# Altium PCB WCAM-BREAKOUT-PCB-R01.PcbDoc (part 2 of 2)
Units mm, origin at the board's own origin, x right, y up, seen from the top; angles counter-clockwise.
Board outline 42.7 x 48.05 mm, 4 copper layers (Top Layer, Mid1, Mid2, Bottom Layer), stack 1.586 mm thick; 121 components, 86 nets, 382 pads, 183 vias.
Unrouted connection lines stored in the file: 147.
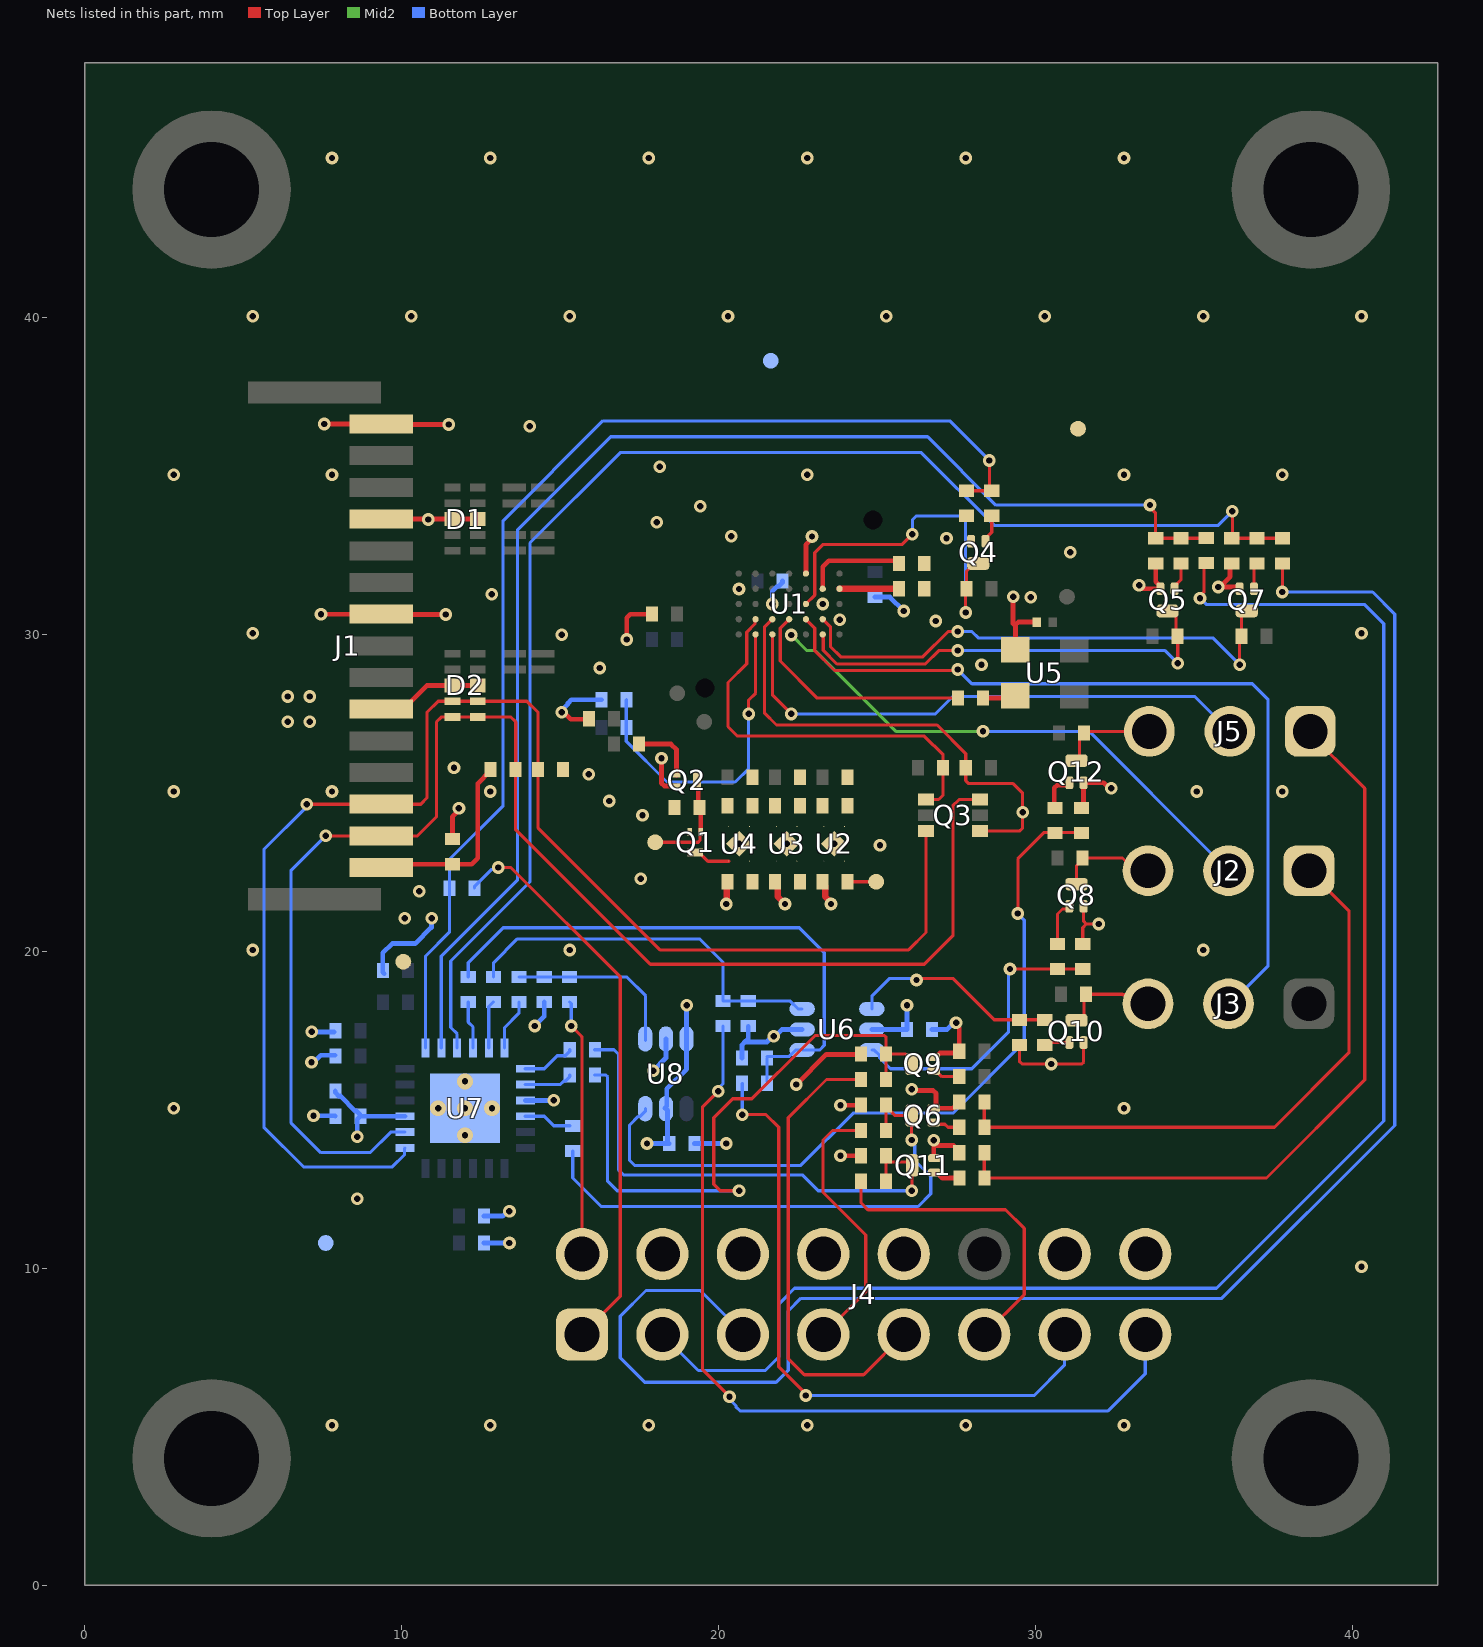
[diagram p4: the nets of this part, all layers, seen from the top]

## Via types
v1: diameter 0.4, hole 0.2, Top Layer to Bottom Layer, tented both sides, 178 vias
v2: diameter 0.5, hole 0.2, Top Layer to Bottom Layer, tented both sides, 5 vias

## Nets (pads, with @x,y where several pads share a name; then routed paths per layer and width w, separated by ;. In a path a pad name is that pad's centre, name@x,y a point inside that pad or via, vN(x,y) a via of type N, cw(c..) or ccw(c..) an arc to the next point about the centre after c; other vN are vias at no path point) (continued)
GND: C1.2 C2.2 C4.2 C5.2 C6.2 C7.2 C8.2 C9.2 C10.2 C11.2 C12.2 C13.2 C14.2 C15.2 C16.2 D1.3 D1.8 D2.3 D2.8 J1.1 J1.4 J1.7 J1.10 J4.4 J4.6 J4.8 J4.10 J4.14 J4.16 Q2.2 Q4.2 Q5.2 Q6.2 Q7.2 Q8.2 Q9.2 Q10.2 Q11.2 Q12.2 R7.1 R8.2 R9.1 R14.1 R19.1 R21.1 R27.1 R28.1 R33.1 R44.1 R45.1 R53.1 R62.1 R64.1 R66.1 R67.1 R68.1 TP6.TP TP7.TP TP8.TP TP9.TP U1.B1 U1.C2 U1.C5 U1.D7 U1.E3 U2.2 U2.5 U3.2 U3.5 U4.2 U4.5 U5.2 U6.2 U7.9 U7.25 U8.2 | length 54.2
  Top Layer w0.1: R53.1@29.5,17.055 29.5,16.538 29.588,16.45 v1(30.5,16.45) 31.466,16.45 31.525,16.509 Q10.2@31.525,17.125 ; R28.1@31.5,20.24 31.5,20.754 31.613,20.867 ; Q8.2@31.525,21.425 31.525,20.955 31.613,20.867 ; v1(32.009,20.867) 31.613,20.867
  Top Layer w0.15: v1(7.45,30.65) J1.7@9.25,30.65 ; v1(7.55,36.65) J1.1@9.35,36.65 9.362,36.638 v1(11.486,36.638) v1(11.486,36.638) v1@11.5,36.65 ; J1.7@9.262,30.638 v1(11.386,30.638) ; J1.10@9.35,27.65 10.05,27.65 10.8,28.4 D2.3@11.6,28.4 D2.8@12.4,28.4 ; J1.4@9.35,33.65 D1.8@12.4,33.65 ; C8.2@11.6,23.545 11.6,24.246 11.806,24.452 v1(11.806,24.52) ; v1(15.05,27.55) 15.118,27.55 15.337,27.331 15.886,27.331 R8.2@15.905,27.35 ; v1(17.1,29.85) 17.1,30.532 17.218,30.65 C4.2@17.905,30.65 ; v1(18.2,26.1) 18.2,25.313 18.288,25.225 Q2.2@18.675,25.225 ; C11.2@20.28,22.2 C11.2@20.293,22.187 ; U1.E3@22.76,31.93 22.76,32.842 22.95,33.032 v1(22.95,33.1) ; U1.B1@23.76,30.5 23.81,30.5 U1.B1@23.82,30.49 23.831,30.479 v1(23.831,30.468) ; v1(26.1,15.65) 26.139,15.611 26.782,15.611 26.87,15.524 Q6.2@26.87,15.05 ; v1(26.792,14.047) 26.795,14.044 v1@26.795,13.873 ; Q6.2@26.795,15.05 Q6.2@26.87,15.05 ; Q9.2@26.795,16.675 26.87,16.675 26.995,16.8 R33.1@27.6,16.8 ; Q11.2@26.82,13.475 26.795,13.5 v1@26.795,13.873 ; v1@27.5,17.7 27.5,17.682 27.6,17.582 R33.1@27.6,16.85 ; R64.1@27.6,13.65 27.6,13.7 27.427,13.873 v1@26.795,13.873 ; R21.1@27.6,15.25 27.6,15.2 27.485,15.085 27.432,15.085 27.397,15.05 Q6.2@26.87,15.05 ; v1(29.3,31.2) 29.3,30.35 29.35,30.3 ; U5.2@29.375,29.525 29.375,30.3 ; 29.375,30.312 29.463,30.4 C13.2@30.05,30.4 ; R68.1@31.461,24.532 31.525,24.596 Q12.2@31.525,25.325 32.157,25.325 32.332,25.15 v1(32.4,25.15) ; v1@33.205,31.509 33.264,31.45 Q5.2@33.95,31.45 33.95,31.525 33.8,31.675 R19.1@33.8,32.255 ; R27.1@36.2,32.255 36.15,32.205 36.15,31.832 35.822,31.504 v1(35.772,31.504) 36.4,31.504 36.45,31.454 Q7.2@36.45,31.45
  Top Layer w0.2: v1(20.25,21.5) 20.265,21.515 20.265,22.159 C11.2@20.293,22.187 ; C6.2@21.78,22.2 21.78,22.15 21.87,22.06 21.87,21.734 22.1,21.504 v1@22.1,21.45 ; C1.2@23.28,22.2 23.28,22.15 23.37,22.06 23.37,21.734 23.55,21.554 v1(23.55,21.5)
  Bottom Layer w0.15: v1(7.165,17.462) R67.1@7.87,17.462 ; v1(7.214,14.814) 7.891,14.814 C16.2@7.905,14.8 ; R66.1@12.595,10.8 v1(13.4,10.8) ; U7.9@13.9,15.3 v1(14.8,15.3) ; v1(14.2,17.65) 14.5,17.951 R62.1@14.5,18.405 ; v1(15.05,27.55) 15.05,27.618 15.251,27.819 15.251,27.844 15.357,27.95 R7.1@16.31,27.95 ; v1(17.941,16.238) 18.341,16.638 U8.2@18.341,17.238 ; C15.2@19.236,13.938 v1(20.241,13.938) ; R44.1@20.746,16.638 20.746,17.055 20.834,17.143 ; R45.1@20.941,17.643 20.941,17.25 20.834,17.143 ; v1(21.7,30.97) 21.7,31.375 21.855,31.53 21.905,31.53 22.02,31.645 C5.2@22.02,31.695 ; v1(21.741,17.328) 21.713,17.328 21.528,17.143 20.834,17.143 ; v1@21.808,17.338 22.008,17.538 U6.2@22.641,17.538 ; R9.1@24.944,31.188 25.412,31.188 v1(25.85,30.75) ; C14.2@26.736,17.538 27.221,17.538 27.432,17.75 v1(27.5,17.75)
  other v1: 7.8,5.05 12.8,5.05 17.8,5.05 22.8,5.05 27.8,5.05 32.8,5.05 40.3,10.05 8.6,12.2 2.8,15.05 32.8,15.05 5.3,20.05 15.3,20.05 35.3,20.05 22.1,21.5 17.55,22.3 25.1,23.35 20.65,23.4 22.15,23.4 23.65,23.4 2.8,25.05 7.8,25.05 12.8,25.05 35.1,25.05 37.8,25.05 11.65,25.8 6.4,27.25 7.1,27.25 6.4,28.05 7.1,28.05 16.25,28.95 28.3,29.05 15.05,30 5.3,30.05 40.3,30.05 26.857,30.433 23.29,30.97 29.856,31.188 12.838,31.282 20.646,31.445 33.277,31.563 31.1,32.6 27.2,33.05 20.4,33.104 18.05,33.554 10.836,33.638 19.427,34.052 2.8,35.05 7.8,35.05 22.8,35.05 32.8,35.05 37.8,35.05 18.148,35.302 14.038,36.582 5.3,40.05 10.3,40.05 15.3,40.05 20.3,40.05 25.3,40.05 30.3,40.05 35.3,40.05 40.3,40.05 7.8,45.05 12.8,45.05 17.8,45.05 22.8,45.05 27.8,45.05 32.8,45.05
  other v2: 12,14.2 11.15,15.05 12,15.05 12.85,15.05 12,15.9
GPIO_1V8__OUT: J5.1 R59.1 R64.2 | length 26
  Top Layer w0.1: R64.2@28.39,13.65 28.39,12.855 R59.1@28.395,12.85 37.3,12.85 40.4,15.95 40.4,25.15 J5.1@38.483,27.067
NetC1_1: C1.1 C6.1 C11.1 Q1.3 TP1.TP U2.4 U3.4 U4.3 U4.4 | length 2.1
  Top Layer w0.1: Q1.3@19.268,23.122 19.393,23.122 19.664,22.851 U4.3@20.325,22.851 ; C1.1@24.07,22.2 TP1.TP@24.975,22.2
NetC2_1: C2.1 R1.2 U2.1
NetC7_1: C7.1 R2.2 U3.1
NetC12_1: C12.1 R4.2 U4.1
NetJ2_3: J2.3 Q8.3 R23.1 | length 3.1
  Top Layer w0.1: Q8.3@31.3,22.125 31.3,22.705 31.495,22.9 R23.1@31.495,22.95 32.754,22.95 33.154,22.55 J2.3@33.56,22.55
NetJ3_3: J3.3 Q10.3 R32.1 | length 3.1
  Top Layer w0.1: Q10.3@31.3,17.825 31.395,17.825 31.541,17.971 31.541,18.596 R32.1@31.595,18.65 32.751,18.65 32.764,18.637 33.273,18.637 J3.3@33.56,18.35
NetJ4_1: J4.1 R30.2 | length 18.1
  Top Layer w0.1: v1(13.05,22.65) 13.45,22.65 16.9,19.2 16.9,9.12 J4.1@15.69,7.91
  Bottom Layer w0.1: R30.2@12.295,22 12.295,22.05 12.838,22.593 12.943,22.593 v1@13,22.65
NetJ4_2: J4.2 R31.1 | length 8.1
  Top Layer w0.1: v1(15.35,17.65) 15.645,17.355 15.688,17.312 J4.2@15.688,10.452
  Bottom Layer w0.1: R31.1@15.3,18.405 15.35,18.355 v1(15.35,17.65)
NetJ4_3: J4.3 R34.2 | length 50.5
  Top Layer w0.1: v1(35.2,31.15) 35.2,31.23 35.329,31.359 35.329,32.189 R34.2@35.4,32.26
  Bottom Layer w0.1: J4.3@18.23,7.91 19.366,6.774 21.474,6.774 21.9,7.2 21.9,8.87 22.4,9.369 35.719,9.369 41,14.65 41,30.35 40.4,30.95 35.409,30.95 35.209,31.15 v1(35.2,31.15)
NetJ4_5: J4.5 R35.2 | length 56.2
  Top Layer w0.1: v1(37.8,31.35) R35.2@37.8,32.255
  Bottom Layer w0.1: J4.5@20.77,7.91 20.77,7.957 19.427,9.3 17.713,9.3 16.9,8.487 16.9,7.175 17.675,6.4 21.82,6.4 22.2,6.78 22.2,8.65 22.6,9.05 35.891,9.05 41.35,14.509 41.35,30.65 40.65,31.35 v1(37.8,31.35)
NetJ4_7: J4.7 R38.2 | length 8.6
  Top Layer w0.1: J4.7@23.31,7.91 24.65,9.25 24.65,11.05 23.3,12.4 23.3,14.05 23.6,14.35 R38.2@24.5,14.35
NetJ4_9: J4.9 R39.2 | length 14.8
  Top Layer w0.1: R39.2@24.5,15.96 23.41,15.96 22.2,14.75 22.2,7.15 22.71,6.64 24.58,6.64 J4.9@25.85,7.91
NetJ4_11: J4.11 R40.2 | length 10
  Top Layer w0.1: R40.2@24.5,12.75 24.5,12.065 24.715,11.85 29.061,11.85 29.65,11.261 29.65,9.17 J4.11@28.39,7.91
NetJ4_13: J4.13 R43.2 | length 20.7
  Top Layer w0.1: v1(20.75,14.85) 21.5,14.85 21.9,14.45 21.9,6.894 v1@22.838,5.956
  Bottom Layer w0.1: R43.2@20.746,15.838 20.75,15.834 v1(20.75,14.85) ; v1(22.752,5.985) 29.971,5.985 30.921,6.935 30.921,7.901 J4.13@30.93,7.91
NetJ4_15: J4.15 R46.2 | length 27.4
  Top Layer w0.1: v1(19.991,15.588) 19.5,15.097 19.5,6.8 v1(20.35,5.95)
  Bottom Layer w0.1: v1(19.991,15.588) 19.991,15.669 20.141,15.819 R46.2@20.141,17.643 ; v1(20.35,5.95) 20.35,5.869 20.549,5.67 20.549,5.631 20.68,5.5 32.3,5.5 33.47,6.67 J4.15@33.47,7.91
NetJ5_3: J5.3 Q12.3 R63.1 | length 3.1
  Top Layer w0.1: Q12.3@31.3,26.025 31.4,26.125 31.4,26.855 31.495,26.95 J5.3@33.6,26.95
NetQ1_1: Q1.1 Q2.3 R3.2 TP4.TP | length 3.3
  Top Layer w0.1: TP4.TP@18,23.45 19.359,23.45 19.418,23.509 19.418,23.747 Q1.1@19.443,23.772
  Top Layer w0.15: Q2.3@19.325,25.35 19.36,25.315 R3.2@19.36,24.55 ; R3.2@19.395,24.55 19.443,24.502 Q1.1@19.443,23.772
NetQ2_1: Q2.1 R6.2 | length 2.2
  Top Layer w0.15: R6.2@17.57,26.625 R6.2@17.495,26.55 18.5,26.55 18.675,26.375 Q2.1@18.675,25.575
NetQ4_1: Q4.1 R13.2 | length 0.9
  Top Layer w0.1: Q4.1@28.425,32.95 28.425,33.032 28.625,33.232 R13.2@28.625,33.755
NetQ5_1: Q5.1 R18.2 | length 0.9
  Top Layer w0.1: Q5.1@34.4,31.45 34.4,31.532 34.6,31.732 R18.2@34.6,32.255
NetQ6_1: Q6.1 R20.2 | length 0.9
  Top Layer w0.1: Q6.1@26.795,14.6 26.847,14.548 27.145,14.548 27.243,14.45 R20.2@27.6,14.45
NetQ7_1: Q7.1 R24.2 | length 0.8
  Top Layer w0.1: Q7.1@36.9,31.45 36.9,32.155 R24.2@37,32.255
NetQ8_1: Q8.1 R25.2 | length 1.4
  Top Layer w0.1: R25.2@30.7,20.24 30.7,21.182 30.859,21.341 31.001,21.341 31.075,21.415 Q8.1@31.075,21.425
NetQ9_1: Q9.1 R29.2 | length 0.9
  Top Layer w0.1: Q9.1@26.795,16.225 26.877,16.225 27.052,16.05 R29.2@27.6,16.05
NetQ10_1: Q10.1 R47.2 | length 0.8
  Top Layer w0.1: R47.2@30.3,17.055 30.37,17.125 Q10.1@31.075,17.125
NetQ11_1: Q11.1 R59.2 | length 0.9
  Top Layer w0.15: Q11.1@26.82,13.025 26.895,13.025 27.07,12.85 R59.2@27.605,12.85
NetQ12_1: Q12.1 R65.2 | length 1.2
  Top Layer w0.15: R65.2@30.623,24.55 30.6,24.573 30.6,25.162 30.688,25.25 31.025,25.25 31.075,25.3 Q12.1@31.075,25.325
NetR15_2: R15.2 U5.3 | length 1.1
  Top Layer w0.1: U5.3@29.3,28 U5.3@29.375,28.075
  Top Layer w0.15: R15.2@28.345,28 U5.3@29.3,28
NetR48_1: R48.1 U7.4 | length 1.5
  Bottom Layer w0.1: R48.1@12.1,18.405 12.1,17.77 12.25,17.62 U7.4@12.25,16.95
NetR49_1: R49.1 U7.5 | length 1.5
  Bottom Layer w0.1: U7.5@12.75,16.95 12.75,18.265 12.89,18.405 R49.1@12.9,18.405
NetR51_1: R51.1 U7.6 | length 1.6
  Bottom Layer w0.1: U7.6@13.25,16.95 13.25,17.6 13.7,18.05 R51.1@13.7,18.405
NetR52_1: R52.1 U7.7 | length 1.7
  Bottom Layer w0.1: U7.7@13.9,16.3 14.5,16.3 14.91,16.71 15.165,16.71 15.305,16.85 R52.1@15.305,16.9
NetR55_1: R55.1 U7.8 | length 1.6
  Bottom Layer w0.1: U7.8@13.9,15.8 15.005,15.8 15.115,15.91 15.165,15.91 15.305,16.05 R55.1@15.305,16.1
NetR56_1: R56.1 U7.10 | length 1.5
  Bottom Layer w0.1: U7.10@13.9,14.8 14.5,14.8 14.8,14.5 R56.1@15.305,14.5
PE_IN_FSIN: Q9.3 R26.1 R39.1 R55.2 | length 19.9
  Top Layer w0.1: v1(20.65,12.45) 20.05,12.45 19.85,12.65 19.85,14.75 20.45,15.35 21.05,15.35 22.75,17.05 23.05,17.35 25.231,17.35 25.29,17.291 R26.1@25.29,16.76 ; R39.1@25.29,15.96 R26.1@25.29,16.76 ; Q9.3@26.095,16.45 26.095,16.573 25.908,16.76 R26.1@25.29,16.76
  Bottom Layer w0.1: R55.2@16.095,16.1 16.441,16.1 16.5,16.041 16.5,12.75 16.8,12.45 v1(20.65,12.45)
PE_IN_GPIO: Q11.3 R40.1 R52.2 R54.1 | length 16.5
  Top Layer w0.1: R40.1@25.29,12.75 25.29,13.36 R54.1@25.43,13.36 ; R54.1@25.29,13.55 25.29,13.5 R54.1@25.43,13.36 ; v1(26.1,12.45) 26.11,12.46 26.11,13.24 Q11.3@26.12,13.25 26.01,13.36 R54.1@25.43,13.36
  Bottom Layer w0.1: R52.2@16.095,16.9 16.7,16.9 16.85,16.75 16.85,13.1 17,12.95 22.65,12.95 23.15,12.45 v1(26.1,12.45)
PE_IN_STROBE: Q6.3 R17.1 R38.1 R56.2 | length 17.1
  Top Layer w0.1: R38.1@25.29,14.35 R17.1@25.29,15.1 ; R17.1@25.29,15.15 R17.1@25.29,15.1 ; v1(26.1,14.05) 26.098,14.052 26.098,14.823 Q6.3@26.095,14.825 25.565,14.825 R17.1@25.29,15.1
  Bottom Layer w0.1: R56.2@15.4,13.7 15.4,12.85 16.3,11.95 26.3,11.95 26.7,12.35 26.7,12.9 26.197,13.403 26.197,13.871 26.069,14 v1@26.05,14
PE_OUT_FSIN: R45.2 R46.1 R49.2 U6.3 | length 12.1
  Bottom Layer w0.1: R49.2@12.9,19.195 12.9,19.65 13.65,20.4 19.4,20.4 20.141,19.659 R46.1@20.141,18.433 R45.2@20.941,18.433 22.263,18.433 22.508,18.188 U6.3@22.641,18.188
PE_OUT_FSIN_INV: R47.1 R53.2 U6.4 | length 6.7
  Top Layer w0.1: v1(26.25,19.1) 26.3,19.15 27.4,19.15 28.705,17.845 R53.2@29.5,17.845 R47.1@30.3,17.845
  Bottom Layer w0.1: U6.4@24.841,18.188 24.841,18.591 25.4,19.15 26.2,19.15 v1(26.25,19.1)
PE_OUT_GPIO: R31.2 R51.2 R62.2 U8.1 | length 5.9
  Bottom Layer w0.1: R51.2@13.7,19.195 R31.2@15.3,19.195 17.105,19.195 17.7,18.6 U8.1@17.7,17.2 ; U8.1@17.691,17.238 U8.1@17.691,17.475
PE_OUT_GPIO_INV: R65.1 R68.2 U8.6 | length 24.2
  Top Layer w0.1: v1(29.45,21.2) 29.45,22.924 30.286,23.76 30.623,23.76 R68.2@31.423,23.76
  Bottom Layer w0.1: U8.6@17.691,15.038 17.691,14.958 17.529,14.796 17.471,14.796 17.191,14.516 17.191,13.409 17.35,13.25 22.6,13.25 24.25,14.9 27.403,14.9 29.65,17.147 29.65,20.991 29.45,21.191 v1(29.45,21.2)
PE_OUT_PWDNB: R24.1 R27.2 R35.1 U7.3 | length 44
  Top Layer w0.1: v1(36.223,33.892) 36.223,33.068 R27.2@36.2,33.045 R35.1@37.8,33.045
  Bottom Layer w0.1: U7.3@11.75,16.95 11.75,17.4 11.55,17.6 11.55,19.7 14.05,22.2 14.05,32.9 16.9,35.75 26.4,35.75 28.7,33.45 35.78,33.45 v1(36.223,33.892)
PE_OUT_STROBE: R43.1 R44.2 R48.2 U6.1 | length 18.1
  Bottom Layer w0.1: R48.2@12.1,19.195 12.1,19.65 13.2,20.75 22.55,20.75 23.341,19.959 23.341,17.041 23.188,16.888 22.432,16.888 22.232,16.688 R44.2@21.536,16.688 ; R43.1@21.536,15.838 R44.2@21.536,16.638
PE_OUT_STROBE_INV: R25.1 R28.2 U6.6 | length 9.4
  Top Layer w0.1: v1(29.2,19.45) R28.2@31.5,19.45
  Bottom Layer w0.1: U6.6@24.841,16.888 24.921,16.888 25.083,16.727 25.083,16.646 25.429,16.3 28,16.3 29.15,17.45 29.15,19.4 v1(29.2,19.45)
PE_OUT_XSHDN: R13.1 R14.2 R30.1 U7.1 | length 36.7
  Top Layer w0.1: R14.2@27.825,34.545 R13.1@28.625,34.545 28.55,34.62 v1(28.55,35.5)
  Bottom Layer w0.1: U7.1@10.75,16.95 10.75,19.85 11.505,20.605 R30.1@11.505,22 11.505,22.905 13.2,24.6 13.2,33.6 16.35,36.75 27.3,36.75 28.5,35.55 28.5,35.5 v1(28.55,35.5)
PE_OUT_XSHDN2: R18.1 R19.2 R34.1 U7.2 | length 42.2
  Top Layer w0.1: v1(33.623,34.092) 33.623,34.011 33.8,33.834 R19.2@33.8,33.045 35.395,33.045 R34.1@35.4,33.05
  Bottom Layer w0.1: U7.2@11.25,16.95 11.25,19.85 13.65,22.25 13.65,33.3 16.6,36.25 26.6,36.25 28.758,34.092 v1(33.623,34.092)
SCL: D2.4 D2.7 J1.13 Q3.3 R36.1 U7.19 | length 47.4
  Top Layer w0.1: v1(7,24.65) J1.13@9.35,24.65 10.6,24.65 10.8,24.85 10.8,27.55 11.15,27.9 D2.4@11.6,27.9 D2.7@12.4,27.9 13.95,27.9 14.305,27.545 R36.1@14.305,25.75 14.305,23.895 18.15,20.05 26,20.05 26.55,20.6 Q3.3@26.55,23.8
  Bottom Layer w0.1: v1(7,24.65) 7,24.569 5.65,23.219 5.65,14.45 6.9,13.2 9.703,13.2 10.087,13.584 10.087,13.787 U7.19@10.1,13.8
SCL_1V8: Q3.1 R10.1 U1.B6 | length 12.8
  Top Layer w0.1: U1.B6@21.17,30.49 21.151,30.471 21.151,30.344 20.89,30.084 20.89,29.082 20.3,28.492 20.3,27.1 20.6,26.8 26.5,26.8 27.09,26.21 R10.1@27.09,25.8 27.09,24.94 26.95,24.8 ; Q3.1@26.55,24.8 26.931,24.8
SDA: D2.5 D2.6 J1.14 Q3.6 R37.1 U7.20 | length 47.5
  Top Layer w0.1: v1(7.6,23.65) J1.14@9.35,23.65 10.5,23.65 11.1,24.25 11.1,27.25 11.25,27.4 D2.5@11.6,27.4 D2.6@12.4,27.4 13.45,27.4 13.6,27.25 R37.1@13.6,25.75 ; R37.1@13.59,25.75 13.59,23.86 17.85,19.6 26.5,19.6 27.4,20.5 27.4,24.6 27.6,24.8 Q3.6@28.25,24.8
  Bottom Layer w0.1: 6.5,17.05 6.5,14.6 7.45,13.65 9,13.65 9.65,14.3 U7.20@10.1,14.3 ; 6.5,17.053 6.5,22.55 v1(7.6,23.65)
SDA_1V8: Q3.4 R11.1 U1.B5 | length 15.2
  Top Layer w0.1: U1.B5@21.7,30.49 21.45,30.24 21.45,27.532 21.832,27.15 26.9,27.15 27.805,26.245 R11.1@27.805,25.8 27.805,25.395 27.9,25.3 29.3,25.3 29.6,25 v1(29.6,24.4) 29.6,23.9 29.5,23.8 Q3.4@28.25,23.8
SNS_FSIN: J3.2 U1.B3 | length 26.1
  Top Layer w0.1: U1.B3@22.76,30.49 23.04,30.21 23.04,29.493 23.663,28.87 27.52,28.87 v1(27.55,28.9)
  Bottom Layer w0.1: v1@27.552,28.898 28,28.45 36.85,28.45 37.35,27.95 37.35,19.55 J3.2@36.2,18.4
SNS_GPIO: J5.2 U1.A5 | length 17.3
  Top Layer w0.1: U1.A5@21.7,30.01 21.7,28.1 v1(22.3,27.5)
  Bottom Layer w0.1: v1@22.309,27.5 26.85,27.5 27.4,28.05 35.04,28.05 J5.2@36.14,26.95
SNS_PWDNB: Q7.3 R22.1 U1.B2 | length 16.6
  Top Layer w0.1: U1.B2@23.29,30.49 23.54,30.24 23.54,29.614 23.854,29.3 26.45,29.3 27.25,30.1 v1(27.55,30.1) ; v1(36.45,29.05) 36.45,29.895 R22.1@36.505,29.95 36.505,30.604 36.651,30.75 Q7.3@36.675,30.75
  Bottom Layer w0.1: v1(27.55,30.1) 28,30.1 28.2,29.9 35.6,29.9 v1(36.45,29.05)
SNS_SID: R5.2 R7.2 U1.A6 | length 10.3
  Top Layer w0.1: v1@20.95,27.45 v1(20.95,27.5) 20.95,27.938 21.17,28.158 U1.A6@21.17,30.01
  Bottom Layer w0.1: R7.2@17.1,27.95 17.09,27.94 R5.2@17.09,27.075 17.09,26.635 18.375,25.35 20.525,25.35 20.95,25.775 v1(20.95,27.5)
SNS_STROBE: J2.2 U1.A4 | length 17.1
  Top Layer w0.1: J2.2@36.1,22.55 J2.2@36.1,22.956
  Mid2 w0.1: v1(22.3,29.993) 22.793,29.5 23.05,29.5 25.6,26.95 v1(28.35,26.95)
  Bottom Layer w0.1: v1(28.35,26.95) 31.7,26.95 35.65,23 J2.2@36.05,23
SNS_VH: C9.1 U1.D1 | length 1.9
  Top Layer w0.2: U1.D1@23.82,31.45 C9.1@25.705,31.45
SNS_VN: C10.1 U1.D2 | length 3.2
  Top Layer w0.1: 23.482,32.332 23.518,32.332
  Top Layer w0.15: U1.D2@23.29,31.45 23.29,32.14 23.482,32.332 ; 23.518,32.332 25.623,32.332 C10.1@25.705,32.25
SNS_XSHDN: Q4.3 R12.1 U1.C3 | length 12
  Top Layer w0.1: U1.C3@22.801,30.955 22.785,30.97 U1.C3@22.76,30.97 23.04,31.25 23.04,32.587 23.303,32.85 25.8,32.85 v1(26.12,33.17) ; v1(27.8,30.7) 27.8,31.42 R12.1@27.83,31.45 27.83,32.003 28.077,32.25 Q4.3@28.2,32.25
  Bottom Layer w0.1: v1(26.12,33.17) 26.12,33.62 26.25,33.75 27.65,33.75 27.8,33.6 v1(27.8,30.7)
SNS_XSHDN2: Q5.3 R16.1 U1.A2 | length 14.1
  Top Layer w0.1: U1.A2@23.29,30.01 23.309,29.991 23.309,29.507 23.739,29.077 26.527,29.077 26.95,29.5 v1(27.55,29.5) ; Q5.3@34.175,30.75 34.292,30.75 34.438,30.604 34.438,30.007 34.5,29.945 v1(34.5,29.1)
  Bottom Layer w0.1: v1(27.55,29.5) 34.1,29.5 v1(34.5,29.1)
SNS_XVCLK: R15.1 U1.B4 | length 7.5
  Top Layer w0.1: U1.B4@22.23,30.49 21.95,30.21 21.95,30.114 21.95,29.906 21.95,29.169 23.119,28 R15.1@27.555,28
STROBE_1V8__OUT: J2.1 R20.1 R21.2 | length 19.6
  Top Layer w0.1: R21.2@28.39,15.25 R20.1@28.39,14.45 37.55,14.45 39.9,16.8 39.9,21.29 J2.1@38.64,22.55
VCC3.3: C8.1 C14.1 C15.1 C16.1 J1.15 Q1.2 R3.1 R17.2 R26.2 R36.2 R37.2 R42.2 R50.1 R54.2 R60.2 R61.2 U6.5 U7.21 U8.3 U8.5 | length 25
  Top Layer w0.15: J1.15@9.35,22.65 9.455,22.755 C8.1@11.6,22.755 12.205,22.755 12.4,22.95 12.4,25.3 12.8,25.7 R37.2@12.8,25.75 ; v1(22.45,15.8) 23.4,16.75 24.49,16.75 R26.2@24.5,16.76 ; v1(23.85,13.55) R54.2@24.5,13.55 ; v1(23.85,15.15) R17.2@24.5,15.15
  Bottom Layer w0.15: v1(7.15,16.5) 7.218,16.5 7.444,16.726 R61.2@7.895,16.726 ; R50.1@7.905,15.6 7.905,15.55 8.02,15.435 8.07,15.435 8.54,14.965 8.58,14.965 8.695,14.85 C16.1@8.695,14.8 ; v1(8.6,14.15) 8.6,14.705 C16.1@8.695,14.8 ; R42.2@9.45,19.3 9.405,19.345 R42.2@9.405,19.4 9.405,19.955 9.7,20.25 10.427,20.25 10.938,20.761 10.938,21.038 v1(10.95,21.05) ; U7.21@10.1,14.8 C16.1@8.695,14.8 ; R60.2@12.595,11.65 13.182,11.65 13.332,11.8 v1(13.4,11.8) ; v1(17.741,13.938) C15.1@18.446,13.938 18.393,13.991 18.393,14.986 U8.5@18.341,15.038 ; U8.5@18.3,15.05 18.363,15.113 18.363,15.663 18.991,16.291 U8.3@18.991,17.238 18.991,18.291 v1(19,18.3) ; U6.5@24.841,17.538 C14.1@25.946,17.538 25.948,17.54 25.948,18.298 v1(25.95,18.3)
  other v1: 10.1,21.05 10.55,21.9 17.6,24.3 16.55,24.75 15.9,25.6
pads on no net: J1.12 J1.MT U7.11 U7.12 U7.13 U7.14 U7.15 U7.16 U7.17 U8.4

## Polygon pours and split planes (outlines as drawn)
GND on Top Layer "NONET_L04_P-001" (solid, remove dead copper, pour order 39): 0,28.8 0,0 42.7,0 42.7,21.593 40.75,21.593 40.75,12.15 33.28,4.68 14.07,4.68 13.25,5.5 13.25,17.845 10.645,20.45 4.55,20.45 4.55,27.9 3.65,28.8
GND on Top Layer "NONET_L04_P-001" (solid, pour order 37): 40.75,21.593 42.7,21.593 42.7,48.05 0,48.05 0,28.8 3.65,28.8 3.65,37.9 5.15,39.4 27.75,39.4 32.65,34.5 35.35,34.5 38.687,34.5 40.75,31.72
NetC1_1 on Top Layer "NONET_L04_P-001" (solid, remove dead copper, pour order 6): 19.019,23.251 19.019,21.664 20.028,20.656 23.594,20.656 24.26,21.322 24.26,22.582 24.13,22.712 24.13,23.172 24.005,23.172 23.82,22.987 23.82,22.501 23.881,22.439 23.881,21.962 23.882,21.961 23.722,21.801 22.918,21.801 22.758,21.961 22.758,22.587 22.63,22.715 22.63,23.175 22.505,23.175 22.32,22.99 22.32,22.501 22.38,22.441 22.38,21.93 22.251,21.801 21.416,21.801 21.256,21.961 21.26,21.965 21.26,22.582 21.13,22.712 21.13,23.17 21.007,23.17 21.005,23.172 20.82,22.987 20.82,22.711 20.88,22.651 20.88,21.958 20.723,21.801 19.805,21.801 19.526,22.081 19.526,23.251
GND on Top Layer "NONET_L04_P-001" (solid, pour order 33): 30.2,31.387 29.95,31.7 29.2,31.7 29.05,31.55 29.05,30.1 28.9,29.95 28.9,29.1 29.8,29.1 29.85,29.15 29.85,29.9 30.2,30.25
VCC3.3 on Top Layer "NONET_L04_P-001" (solid, pour order 30): 14.9,26 14.9,25.5 16.5,23.9 18.35,23.9 18.6,23.65 19.16,23.65 19.16,24.04 18.8,24.4 18.8,24.8 17.5,24.8 16.3,26
VCC3.3 on Top Layer "NONET_L04_P-001" (solid, pour order 29): 9.45,22.95 9.45,22.35 9.65,22.05 9.65,20.9 9.8,20.75 11.4,20.75 11.85,21.2 11.85,22.95 11.75,23.05 9.7,23.05
NetC12_1 on Top Layer "NONET_L04_P-001" (solid, pour order 3): 20.88,25.74 20.88,24.148 20.822,24.09 20.823,24.089 20.823,23.811 21.005,23.629 21.124,23.629 21.26,23.766 21.26,25.74
NetC7_1 on Top Layer "NONET_L04_P-001" (solid, pour order 4): 22.38,25.74 22.38,24.148 22.322,24.09 22.323,24.089 22.323,23.811 22.505,23.629 22.624,23.629 22.76,23.766 22.76,25.74
NetC2_1 on Top Layer "NONET_L04_P-001" (solid, pour order 5): 23.88,25.74 23.88,24.148 23.822,24.09 23.823,24.089 23.823,23.811 24.005,23.629 24.124,23.629 24.26,23.766 24.26,25.74
GND on Top Layer "NONET_L04_P-001" (solid, pour order 8): 20.09,24.84 20.09,24.169 20.17,24.089 20.17,23.47 20.649,22.99 20.938,23.279 21.862,23.279 22.149,22.991 22.437,23.279 23.361,23.279 23.649,22.991 23.68,23.027 23.968,23.31 24.058,23.4 23.479,23.979 23.479,24.84 23.09,24.84 23.09,24.368 23.17,24.288 23.17,23.629 22.996,23.455 22.506,23.455 22.158,23.803 22.158,23.807 22.154,23.807 21.981,23.981 21.981,24.839 21.591,24.839 21.591,24.172 21.67,24.093 21.67,23.619 21.552,23.5 20.96,23.5 20.48,23.98 20.48,24.84
DOVDD on Top Layer "NONET_L04_P-001" (solid, pour order 9): 23.47,25.26 23.47,25.74 23.515,25.74 23.765,25.99 23.765,26.409 22.765,26.409 22.765,26.02 23.045,25.74 23.09,25.74 23.09,25.267 23.097,25.26
AVDD on Top Layer "NONET_L04_P-001" (solid, pour order 10): 20.469,25.258 20.469,25.738 20.514,25.738 20.763,25.988 20.763,26.407 19.763,26.407 19.763,26.019 20.043,25.738 20.089,25.738 20.089,25.266 20.096,25.258
DVDD on Top Layer "NONET_L04_P-001" (solid, pour order 11): 21.972,25.265 21.972,25.745 22.017,25.745 22.266,25.995 22.266,26.414 21.266,26.414 21.266,26.025 21.546,25.745 21.592,25.745 21.592,25.273 21.599,25.265
GND on Top Layer "NONET_L04_P-001" (solid, pour order 2): 28.065,33.945 28.1,33.91 28.1,32.795 28.057,32.751 27.901,32.751 26.685,31.535 26.685,31.21 26.305,31.21 26.305,32.663 27.587,33.945
GND on Top Layer "NONET_L04_P-001" (solid, pour order 1): 9.7,27.95 8.1,27.95 7.5,28.65 6,28.65 5.6,28.25 5.6,26.95 6,26.55 7.5,26.55 8.1,27.35 9.7,27.35
GND on Mid2 "NONET_L04_P-001" (solid, pour order 35): 0,48.05 0,0 42.7,0 42.7,48.05
AVDD on Mid2 "NONET_L04_P-001" (solid, pour order 0): 20.85,26.5 20.9,26.45 20.9,25.9 20.8,25.8 18.9,25.8 18.55,26.15 18.55,32.15 19.1,32.7 24.6,32.7 25.1,32.2 25.1,29.8 24.95,29.65 23.1,29.65 22.4,30.35 22.2,30.35 22,30.55 22,31.1 22.05,31.2 22.4,31.2 22.45,31.1 22.45,30.8 22.6,30.65 22.87,30.65 23.15,30.883 23.15,32.05 23,32.2 19.7,32.2 19.25,31.75 19.25,30.65 19.35,30.55 19.75,30.55 19.9,30.4 19.9,30.1 19.75,29.95 19.4,29.95 19.3,29.85 19.3,26.6 19.4,26.5 20.25,26.5
DVDD on Mid2 "NONET_L04_P-001" (solid, pour order 18): 20.95,31.25 22.9,31.25 23.05,31.4 23.05,32 22.9,32.15 19.75,32.15 19.3,31.7 19.3,30.7 19.4,30.6 19.8,30.6 19.95,30.45 19.95,30.05 19.8,29.9 19.45,29.9 19.35,29.8 19.35,28.4 19.35,26.683 19.45,26.55 21.2,26.55 21.2,25.9 21.3,25.8 22.4,25.8 22.5,25.9 22.5,28.155 20.75,30.011 20.75,31.05
DOVDD on Mid2 "Mid2-DOVDD" (solid, pour order 19): 27.5,24 28.7,22.8 29.95,21.55 29.95,19.15 29.5,18.7 29.5,18.45 29.7,18.25 30.35,18.25 30.7,18.6 30.7,25.4 29.8,26.3 29.8,29.25 30.2,29.65 38,29.65 38.05,29.6 38.4,29.6 38.55,29.75 38.55,30.1 38.45,30.2 33.55,30.2 32.3,30.2 32.05,30.2 31.95,30.3 31.95,30.85 31.8,31 31.15,31 31,30.85 31,30.3 30.9,30.2 29.85,30.2 29.3,30.75 28.35,30.75 28.2,30.6 28.2,30.3 28.4,30.1 29.05,30.1 29.2,29.95 29.2,27.5 29.05,27.35 29.05,26.3 28.9,26.15 26.15,26.15 23,29.3 21.4,30.811 21.4,31.1 21.3,31.2 21,31.2 20.9,31.1 20.9,30.8 21,30.7 21,29.9 22.6,28.3 22.6,25.9 22.7,25.8 22.7,25.55 22.65,25.5 17.9,25.5 17.7,25.7 17.25,25.7 17.15,25.6 17.15,25.15 17.3,25 20.9,25 21.1,24.8 21.1,21.35 21.25,21.2 21.6,21.2 21.75,21.35 21.75,24
VCC3.3 on Mid2 "Mid2-VCC3.3" (solid, pour order 31): 6.45,15 7.7,13.75 8.85,13.75 11.1,11.5 14.65,11.5 16.7,13.55 17.65,13.55 18.45,12.75 21.65,12.75 22.2,13.3 22.2,15.05 22.45,15.3 23.05,15.3 23.35,14.95 23.35,13.2 23.55,13 24.05,13 24.25,13.2 24.25,17.45 24.6,17.8 26.4,17.8 26.55,18 26.55,18.55 26.4,18.7 24.45,18.7 23.6,17.85 23.6,16.6 23.15,16.15 22.15,16.15 21.65,15.65 21.65,13.6 21.4,13.35 18.8,13.35 18.45,13.7 18.45,14 19.3,14.85 19.3,17.8 19.7,18.2 19.7,18.95 19.6,19.05 18.35,19.05 18.25,18.95 18.25,18.25 18.7,17.8 18.7,15.5 17.55,14.35 16,14.35 13.95,12.3 11.7,12.3 10.6,13.4 10.6,20.25 11.2,20.85 11.2,21.75 13.65,24.2 15.6,24.2 16.05,23.75 18.25,23.75 18.6,24.1 18.6,24.9 17.3,24.9 16.7,25.5 16.7,25.8 16.4,26.1 15.55,26.1 15.35,25.95 15.3,25.9 15.3,24.8 13,24.8 9.6,21.4 9.6,19.1 8.15,19.1 6.45,17.4
GND on Bottom Layer (solid, pour order 43): 0,0 42.7,0 42.7,11.14 38.84,11.14 32.1,4.4 13.3,4.4 9.5,8.2 9.5,11.2 8.1,12.6 4.9,12.6 3.269,14.231 3.269,35.8 5.311,37.95 39.6,37.95 41.75,35.8 41.75,14.25 38.85,11.14 42.7,11.14 42.7,48.05 0,48.05
AGND on Bottom Layer "NONET_L04_P-001" (solid, pour order 14): 17.55,29.517 17.55,26.997 18.647,25.9 20.716,25.9 20.716,27.9 23.326,27.9 24.408,28.85 24.408,30.285 25.2,30.806 25.2,32.375 24.162,32.375 19.784,32.375 17.55,30.2
GND on Mid1 "NONET_L04_P-001" (solid, pour order 32): 0,48.05 0,0 42.7,0 42.7,48.05

## Other copper
Mid2:
  pour cut-out: 24.25,25.45 23.9,25.8

## Silkscreen, mask and mechanical layers (free items; w line width, h text height)
Top Overlay:
  region: 24.358,29.308 24.358,29.528 23.158,29.528 23.158,29.308
  rectangle: 24.14,29.308 24.36,30.508
  rectangle: 20.1,29.308 20.32,30.508
  region: 20.1,32.628 20.1,32.408 21.3,32.408 21.3,32.628
  region: 20.32,32.628 20.1,32.628 20.1,31.428 20.32,31.428
  region: 24.36,32.628 24.14,32.628 24.14,31.428 24.36,31.428
  region: 24.358,32.408 24.358,32.628 23.158,32.628 23.158,32.408
  region: 20.1,29.528 20.1,29.308 21.3,29.308 21.3,29.528
  lines w0.1: 14.831,5.628 14.824,5.636 14.824,6.741 14.932,6.85 ; 16.544,6.36 16.738,6.555 16.738,9.333 16.606,9.465 ; 16.995,0.48 17.002,11.726 ; 17.55,6.525 17.287,6.787 ; 17.6,30.25 18,30.25 18.7,29.55 18.7,28.6 ; 17.65,9.55 17.65,9.539 17.207,9.095 17.207,6.868 17.287,6.787 ; 17.83,27.687 17.83,27.32 17.95,27.2 19.1,27.2 ; 18.918,3.835 19.283,4.2 19.283,9.417 19.1,9.6 ; 19.5,0.503 19.5,11.726 ; 19.887,6.533 19.887,6.928 19.996,7.037 ; 21.451,3.835 21.821,4.204 21.821,9.24 21.455,9.605 ; 22.042,0.48 22.045,11.726 ; 22.523,6.221 22.523,6.908 22.632,7.017 ; 23.964,3.794 24.334,4.163 24.334,9.199 23.968,9.564 ; 24.6,0.48 24.6,11.726 ; 25.09,5.985 25.09,6.928 25.199,7.037 ; 26.531,3.774 26.9,4.144 26.9,9.179 26.535,9.544 ; 27.15,0.495 27.15,11.726 ; 27.647,5.985 27.647,6.918 27.755,7.027 ; 29.009,4.145 29.378,4.515 29.378,9.129 29.012,9.495 ; 29.733,0.495 29.733,11.726 ; 30.243,6.533 30.243,6.928 30.352,7.037 ; 31.109,15.934 31.3,16.125 31.3,16.69 ; 31.615,3.744 31.984,4.114 31.984,9.149 31.619,9.515 ; 32.224,0.495 32.224,11.726 ; 32.671,6.493 32.671,6.888 32.78,6.997 ; 34.142,3.635 34.511,4.005 34.511,9.04 34.146,9.406 ; 17.287,6.787 17.287,6.787 ; 14.311,0.48 14.311,11.726 34.78,11.726 34.78,0.48 14.311,0.48 ; 16.817,39.783 17.2,39.4 32.9,39.4 33.167,39.667 33.167,45.653 32.871,45.95 17.1,45.95 16.817,45.667 16.817,39.783 ; 19.23,27.97 19.23,33.97 25.23,33.97 25.23,27.97 19.23,27.97
  text "OV Tech GmbH" at 20.05,42.816 h1.4
  text "WCAM-BREAKOUT-PCB-R01" at 18.7,41.661 h1
  text "GND" at 19.347,0.656 h1 r90
  text "GND" at 26.997,0.648 h1 r90
  text "nINT" at 29.58,0.648 h1 r90
  text "GND" at 32.071,0.648 h1 r90
  text "XSHDN" at 15.469,0.633 h1 r90
  text "GPIO_O" at 16.683,0.633 h1 r90
  text "XSHDN2" at 18.172,0.633 h1 r90
  text "PDNB_O" at 20.719,0.633 h1 r90
  text "GND" at 21.889,0.633 h1 r90
  text "STRB_I" at 23.217,0.633 h1 r90
  text "GND" at 24.447,0.633 h1 r90
  text "FSIN_I" at 25.777,0.633 h1 r90
  text "GPIO_I" at 28.356,0.633 h1 r90
  text "STRB_O" at 30.874,0.633 h1 r90
  text "FSIN_O" at 33.393,0.633 h1 r90
  text "GND" at 34.78,0.48 h1 r90
Bottom Overlay:
  circle w0.2: c33.56,13.105 r0.473
  circle w0.2: c36.1,13.105 r0.473
  circle w0.2: c38.64,13.105 r0.473
  circle w0.2: c33.56,14.555 r0.473
  circle w0.2: c36.1,14.555 r0.473
  circle w0.2: c38.64,14.555 r0.473
  circle w0.2: c38.64,16 r0.473
  circle w0.2: c36.1,16 r0.473
  circle w0.2: c33.56,16 r0.473
  lines w0.1: 34.033,16 34.348,16 ; 34.039,13.105 34.354,13.105 ; 34.696,16 35.011,16 ; 34.702,13.105 35.017,13.105 ; 35.314,16 35.628,16 ; 35.32,13.105 35.635,13.105 ; 36.609,14.555 36.924,14.555 ; 36.627,16 36.942,16 ; 37.202,14.543 37.517,14.543 ; 37.221,16 37.535,16 ; 37.82,14.538 38.135,14.538 ; 37.839,16 38.153,16 ; 29.35,11.438 41.34,11.438 41.34,12.28 41.34,16.72 29.35,16.72 29.35,11.438
  lines w0.2: 34.074,14.555 35.63,14.554 ; 36.623,13.105 38.167,13.105
  text "GPIO" at 35.741,28.495 h1
  text "STROBE" at 37.958,24.095 h1
  text "FSIN" at 35.809,19.773 h1
  text "NC" at 32.45,15.3 h1
  text "IN" at 32.45,13.85 h1
  text "OUT" at 32.5,12.4 h1
  text "J-CFG" at 39.641,11.438 h1 r270
Mechanical 1:
  the board outline again, w0.1
Image Sensor optics area:
  lines w0.1: 19.23,27.97 19.23,33.97 25.23,33.97 25.23,27.97 19.23,27.97
  text "Keep out area" at 21.353,29.668 h0.2 r45
  text "Image sensor optics" at 20.653,29.568 h0.2 r45

## Text inside footprints (layer, text, board x,y; h text height)
J1: Top Courtyard "1.6mm slider moving space" at 1.75,38.705 h0.75 r270
U1: Top 3D Body (Mech13) "PLACE TOWARS BOTTOM PCB EDGE" at 20.63,29.27 h0.2